# EAGLE board CT_schematic (EAGLE 7.6.0)

Size 100 x 80 mm. Coordinates in mm from the lower left corner, seen from the top.
Outline: 0,0 100,0 100,80 0,80 0,0
Copper layers (1*16): Top 0.035mm / dielectric 1.5mm / Bottom 0.035mm
Design rules "default": minimum track width 10mil, minimum drill 24mil, track to track 8mil, track to pad 8mil, pad to pad 8mil, via to via 8mil, smd to smd 8mil, copper to edge 40mil, drill to drill 8mil, minimum pad ring 10mil, minimum via ring 8mil, stop-mask expansion 4mil, vias tented up to drill 0mil, thermal gap 10mil

## Footprints (pad centres in the part's own frame; a part is rotated, then mirrored left to right if it is on the bottom)
C0603 = smd 0.8 x 0.8: 1 -0.762,0; 2 0.762,0
C0402 = smd 0.5 x 0.5: 1 -0.508,0; 2 0.508,0
C0805 = smd 1.2 x 1.3: 1 -1.016,0; 2 1.016,0
C1206 = smd 1.3 x 1.6: 1 -1.524,0; 2 1.524,0
C1210 = smd 1.2 x 2.5: 1 -1.524,0; 2 1.524,0
EXV-9H = smd 3.505 x 1.676: 1 -2.857,0; 2 2.857,0
L0603 = smd 0.8 x 0.8: 1 -0.762,0; 2 0.762,0
L1210 = smd 1.2 x 2.5: 1 -1.524,0; 2 1.524,0
PJ-037B_PACKAGE = drill 3.7 square: 1 12,0 | drill 3.2 square: 2 6,0
R0603 = smd 0.8 x 0.8: 1 -0.762,0; 2 0.762,0
TSSOP20 = smd 1.473 x 0.356: 1 -2.819,2.921; 2 -2.819,2.286; 3 -2.819,1.626; 4 -2.819,0.965; 5 -2.819,0.33; 6 -2.819,-0.33; 7 -2.819,-0.965; 8 -2.819,-1.626; 9 -2.819,-2.286; 10 -2.819,-2.921; 11 2.819,-2.921; 12 2.819,-2.286; 13 2.819,-1.626; 14 2.819,-0.965; 15 2.819,-0.33; 16 2.819,0.33; 17 2.819,0.965; 18 2.819,1.626; 19 2.819,2.286; 20 2.819,2.921
TST-110-05-T-D-RA = drill 1 pad 1.7 square: 1 0,0 | drill 1 pad 1.7: 2 0,2.54; 3 2.54,0; 4 2.54,2.54; 5 5.08,0; 6 5.08,2.54; 7 7.62,0; 8 7.62,2.54; 9 10.16,0; 10 10.16,2.54; 11 12.7,0; 12 12.7,2.54; 13 15.24,0; 14 15.24,2.54; 15 17.78,0; 16 17.78,2.54; 17 20.32,0; 18 20.32,2.54; 19 22.86,0; 20 22.86,2.54
SSOP-20 = smd 1.651 x 0.432: 1 -3.48,2.925; 2 -3.48,2.275; 3 -3.48,1.625; 4 -3.48,0.975; 5 -3.48,0.325; 6 -3.48,-0.325; 7 -3.48,-0.975; 8 -3.48,-1.625; 9 -3.48,-2.275; 10 -3.48,-2.925; 11 3.48,-2.925; 12 3.48,-2.275; 13 3.48,-1.625; 14 3.48,-0.975; 15 3.48,-0.325; 16 3.48,0.325; 17 3.48,0.975; 18 3.48,1.625; 19 3.48,2.275; 20 3.48,2.925
HTSS-105-01-G-D = drill 1 pad 1.8 square: 1 0,0 | drill 1 pad 1.8: 2 0,2.54; 3 2.54,0; 4 2.54,2.54; 5 5.08,0; 6 5.08,2.54; 7 7.62,0; 8 7.62,2.54; 9 10.16,0; 10 10.16,2.54
TDFN-8/6MM = smd 0.3 x 0.75: 1 0,0; 2 0.5,0; 3 1,0; 4 1.5,0; 5 1.5,3; 6 1,3; 7 0.5,3; 8 0,3
ASFL1 = smd 1.7 x 1.5: 1 -1.27,-1.1; 2 1.27,-1.1; 3 1.27,1.1; 4 -1.27,1.1
WSON-8 = smd 0.3 x 0.6: 1 -0.75,0; 2 0.05,0; 3 0.85,0; 4 1.65,0; 5 1.65,3.8; 6 0.85,3.8; 7 0.05,3.8; 8 -0.75,3.8 | smd 3 x 2.6: PAD 0.45,1.9
SON-6 = smd 0.55 x 0.3: 1 -0.355,0.5 | smd 0.52 x 0.3: 2 -0.37,0; 3 -0.37,-0.5; 4 0.37,-0.5; 5 0.37,0; 6 0.37,0.5
SW_4-1437565-2 = smd 1.4 x 2.1: 1 -2.23,4.55; 2 -2.23,-4.55; 3 2.23,4.55; 4 2.23,-4.55
LGM67K-G1J2-24-Z = smd 0.8 x 1.4: A -2,0; C 0,0
NC7SZ125M5X = smd 1.3 x 0.7: 1 -1.3,0.95; 2 -1.3,0; 3 -1.3,-0.95; 4 1.3,-0.95; 5 1.3,0.95

## Placement (x,y rotation side)
C1  1e-07  [C0603]  -27.94,62.23 0 top  (outside the outline)
C2  4.7e-06  [C0603]  -24.13,62.23 0 top  (outside the outline)
C3  1e-08  [C0603]  -31.75,62.23 0 top  (outside the outline)
C4  1e-06  [C0603]  -35.56,62.23 0 top  (outside the outline)
C5  1e-07  [C0402]  -34.29,67.31 0 top  (outside the outline)
C6  1e-06  [C0603]  -39.37,62.23 0 top  (outside the outline)
C7  1e-06  [C0603]  -43.18,62.23 0 top  (outside the outline)
C8  1e-06  [C0603]  -46.99,62.23 0 top  (outside the outline)
C9  4.7e-06  [C0805]  -15.24,57.15 0 top  (outside the outline)
C10  1e-08  [C0402]  -38.1,67.31 0 top  (outside the outline)
C11  1e-08  [C0402]  -41.91,67.31 0 top  (outside the outline)
C12  1e-08  [C0402]  -45.72,67.31 0 top  (outside the outline)
C13  1e-05  [C1206]  -52.07,49.53 0 top  (outside the outline)
C14  1e-05  [C1210]  -39.37,50.8 0 top  (outside the outline)
C15  1e-07  [C0402]  -49.53,67.31 0 top  (outside the outline)
C16  0.0001  [EXV-9H]  -54.61,43.18 0 top  (outside the outline)
C17  0.0001  [EXV-9H]  -17.78,50.8 0 top  (outside the outline)
C18  1e-08  [C0402]  -53.34,67.31 0 top  (outside the outline)
C19  1e-08  [C0402]  -57.15,67.31 0 top  (outside the outline)
F1  240.0  [L0603]  -50.8,62.23 0 top  (outside the outline)
I1  1.5e-05  [L1210]  -45.72,50.8 0 top  (outside the outline)
J1  PJ-037B  [PJ-037B_PACKAGE]  -49.53,7.62 0 top  (outside the outline)
R1  10000.0  [R0603]  -50.8,57.15 0 top  (outside the outline)
R2  1000.0  [R0603]  -54.61,62.23 0 top  (outside the outline)
R3  1600.5  [R0603]  -58.42,62.23 0 top  (outside the outline)
R4  4700.0  [R0603]  -62.23,62.23 0 top  (outside the outline)
R5  2200.0  [R0603]  -15.24,67.31 0 top  (outside the outline)
R6  2200.0  [R0603]  -19.05,67.31 0 top  (outside the outline)
R7  10000.0  [R0603]  -55.88,57.15 0 top  (outside the outline)
R8  10000.0  [R0603]  -60.96,57.15 0 top  (outside the outline)
R9  100000.0  [R0603]  -20.32,57.15 0 top  (outside the outline)
R10  100000.0  [R0603]  -25.4,57.15 0 top  (outside the outline)
R11  100000.0  [R0603]  -30.48,57.15 0 top  (outside the outline)
R12  100000.0  [R0603]  -35.56,57.15 0 top  (outside the outline)
R13  2231.0  [R0603]  -22.86,67.31 0 top  (outside the outline)
R14  1000.0  [R0603]  -26.67,67.31 0 top  (outside the outline)
R15  10000.0  [R0603]  -15.24,62.23 0 top  (outside the outline)
R16  10000.0  [R0603]  -20.32,62.23 0 top  (outside the outline)
R17  9100.0  [R0603]  -30.48,67.31 0 top  (outside the outline)
R18  680000.0  [R0603]  -40.64,57.15 0 top  (outside the outline)
R19  120000.0  [R0603]  -45.72,57.15 0 top  (outside the outline)
U1  stm32f031f4p7  [TSSOP20]  -30.48,8.89 0 top  (outside the outline)
U2  TST-110-05-T-D-RA  [TST-110-05-T-D-RA]  -46.99,40.64 0 top  (outside the outline)
U3  MAX3218EAP+T  [SSOP-20]  -17.78,34.29 0 top  (outside the outline)
U4  HTSS-105-01-G-D  [HTSS-105-01-G-D]  -46.99,21.59 0 top  (outside the outline)
U5  24AA01T-I/MNY  [TDFN-8/6MM]  -62.23,21.59 0 top  (outside the outline)
U6  ASFL1-25MHZ-NCS  [ASFL1]  -57.15,34.29 0 top  (outside the outline)
U7  LP3878SDX-ADJ/NOPB  [WSON-8]  -40.64,33.02 0 top  (outside the outline)
U8  TPS3895ADRYR  [SON-6]  -59.69,66.04 0 top  (outside the outline)
U9  4-1437565-2  [SW_4-1437565-2]  -27.94,24.13 0 top  (outside the outline)
U10  Q65110A2395  [LGM67K-G1J2-24-Z]  -27.94,50.8 0 top  (outside the outline)
U11  nc7sz125m5x  [NC7SZ125M5X]  -57.15,49.53 0 top  (outside the outline)
U12  nc7sz125m5x  [NC7SZ125M5X]  -63.5,49.53 0 top  (outside the outline)

## Library data of the parts
C1-C19 F1 I1 J1 R1-R19 U1-U12 = circuit_tree

## Nets
CLK_U1_2: U1.2 U6.3
GND: C1.2 C2.2 C3.2 C4.2 C5.2 C6.2 C7.2 C8.2 C10.2 C11.2 C12.2 C13.2 C14.2 C15.2 C16.2 C17.2 C18.2 C19.2 J1.2 R2.2 R7.2 R14.2 R17.2 R19.2 U1.15 U2.4 U2.6 U2.8 U2.10 U2.12 U2.14 U2.16 U2.18 U2.20 U3.5 U3.17 U3.20 U4.9 U5.4 U6.2 U7.3 U7.PAD U8.2 U10.C U11.2 U11.3 U12.1 U12.3
NET_U1_1: R7.1 U1.1
NET_U1_4: R4.1 U1.4 U12.4
NET_U1_5: C3.1 C4.1 F1.1 U1.5
NET_U1_13: R3.1 U1.13 U10.A
NET_U1_14: R1.1 U1.14 U9.3 U9.4
NET_U1_17: R5.1 U1.17 U5.6
NET_U1_18: R6.1 U1.18 U5.5
NET_U3_1: I1.1 U3.1
NET_U3_2: R9.1 U3.2
NET_U3_3: R10.1 U3.3
NET_U3_4: R11.1 U3.4
NET_U3_15: C8.1 U3.15
NET_U3_16: C9.2 U3.16
NET_U3_18: C9.1 U3.18
NET_U3_19: C7.1 U3.19
NET_U4_3: U3.12 U4.3
NET_U4_4: U3.11 U4.4
NET_U4_5: U3.14 U4.5
NET_U4_6: U3.13 U4.6
NET_U7_1: C12.1 U7.1
NET_U7_6: R13.2 R14.1 U7.6
NET_U7_8: R12.1 U7.8
NET_U8_1: R16.1 R17.1 U8.1
NET_U8_3: R18.2 R19.1 U8.3
NET_U8_4: R15.1 U8.4 U11.4 U12.2
NET_U9_1: R2.1 U9.1 U9.2
PROC_SYS_SWCLK: U1.20 U2.9
PROC_SYS_SWDIO: U1.19 U2.7
PROC_USART1_CTS: U1.6 U3.8
PROC_USART1_RTS: U1.7 U3.10
PROC_USART1_RX: U1.9 U3.9
PROC_USART1_TX: U1.8 U3.7
RST_OUT_U2_SRESET_B: R8.1 U2.15 U11.1
VCC_S1_6V0: C13.1 C16.1 C17.1 J1.1 R12.2 U7.4
VCC_TIER1_3V3: C1.1 C2.1 C5.1 C6.1 C10.1 C11.1 C14.1 C15.1 C18.1 C19.1 F1.2 I1.2 R1.2 R3.2 R4.2 R5.2 R6.2 R8.2 R9.2 R10.2 R11.2 R13.1 R15.2 R16.2 R18.1 U1.16 U2.1 U3.6 U5.7 U5.8 U6.4 U7.5 U8.6 U11.5 U12.5

## Tracks (layer width: path | path; a pad name or v marks a point on that pad's centre or on a via)
CLK_U1_2  (1 unrouted)
GND  (47 unrouted)
NET_U1_1  (1 unrouted)
NET_U1_4  (2 unrouted)
NET_U1_5  (3 unrouted)
NET_U1_13  (2 unrouted)
NET_U1_14  (3 unrouted)
NET_U1_17  (2 unrouted)
NET_U1_18  (2 unrouted)
NET_U3_1  (1 unrouted)
NET_U3_2  (1 unrouted)
NET_U3_3  (1 unrouted)
NET_U3_4  (1 unrouted)
NET_U3_15  (1 unrouted)
NET_U3_16  (1 unrouted)
NET_U3_18  (1 unrouted)
NET_U3_19  (1 unrouted)
NET_U4_3  (1 unrouted)
NET_U4_4  (1 unrouted)
NET_U4_5  (1 unrouted)
NET_U4_6  (1 unrouted)
NET_U7_1  (1 unrouted)
NET_U7_6  (2 unrouted)
NET_U7_8  (1 unrouted)
NET_U8_1  (2 unrouted)
NET_U8_3  (2 unrouted)
NET_U8_4  (3 unrouted)
NET_U9_1  (2 unrouted)
PROC_SYS_SWCLK  (1 unrouted)
PROC_SYS_SWDIO  (1 unrouted)
PROC_USART1_CTS  (1 unrouted)
PROC_USART1_RTS  (1 unrouted)
PROC_USART1_RX  (1 unrouted)
PROC_USART1_TX  (1 unrouted)
RST_OUT_U2_SRESET_B  (2 unrouted)
VCC_S1_6V0  (5 unrouted)
VCC_TIER1_3V3  (34 unrouted)